# EAGLE board W25N01GVZ (EAGLE 7.5.0)

Size 160 x 100 mm. Coordinates in mm from the lower left corner, seen from the top.
Outline: 0,0 160,0 160,100 0,100 0,0
Copper layers (1*16): Top 0.035mm / dielectric 1.5mm / Bottom 0.035mm
Design rules "default": minimum track width 10mil, minimum drill 24mil, track to track 8mil, track to pad 8mil, pad to pad 8mil, via to via 8mil, smd to smd 8mil, copper to edge 40mil, drill to drill 8mil, minimum pad ring 10mil, minimum via ring 8mil, stop-mask expansion 4mil, vias tented up to drill 0mil, thermal gap 10mil

## Footprints (pad centres in the part's own frame; a part is rotated, then mirrored left to right if it is on the bottom)
SON127P800X600X80-9N = smd 0.94 x 0.44: 1 -3.895,1.905; 2 -3.895,0.635; 3 -3.895,-0.635; 4 -3.895,-1.905; 5 3.895,-1.905; 6 3.895,-0.635; 7 3.895,0.635; 8 3.895,1.905 | smd 3.4 x 4.3: 9 0,0

## Placement (x,y rotation side)
U1  W25N01GVZEIG_TR  [SON127P800X600X80-9N]  39.37,71.12 0 top

## Library data of the parts
U1 = W25N01GVZEIG_TR; AVAILABILITY: Unavailable; DESCRIPTION: FLASH - NAND Memory IC 1Gb (128M x 8) SPI 104MHz 8-WSON (8x6); MF: Winbond Electronics; MP: W25N01GVZEIG TR; PACKAGE: WSON-8 Winbond; PRICE: None

## Nets
CLK: U1.6
CS: U1.1
GND: U1.4
MISO: U1.2
MOSI: U1.5
VCC: U1.3 U1.7 U1.8

## Tracks (layer width: path | path; a pad name or v marks a point on that pad's centre or on a via)
VCC  (2 unrouted)